# Altium PCB BMS_SLAVE.PcbDoc
Units mm, origin at the board's own origin, x right, y up, seen from the top; angles counter-clockwise.
Board outline 68.05 x 40 mm, 4 copper layers (Top Layer, Layer 1, Layer 2, Bottom Layer), stack 0.603 mm thick; 65 components, 38 nets, 174 pads, 128 vias.
Unrouted connection lines stored in the file: 2.
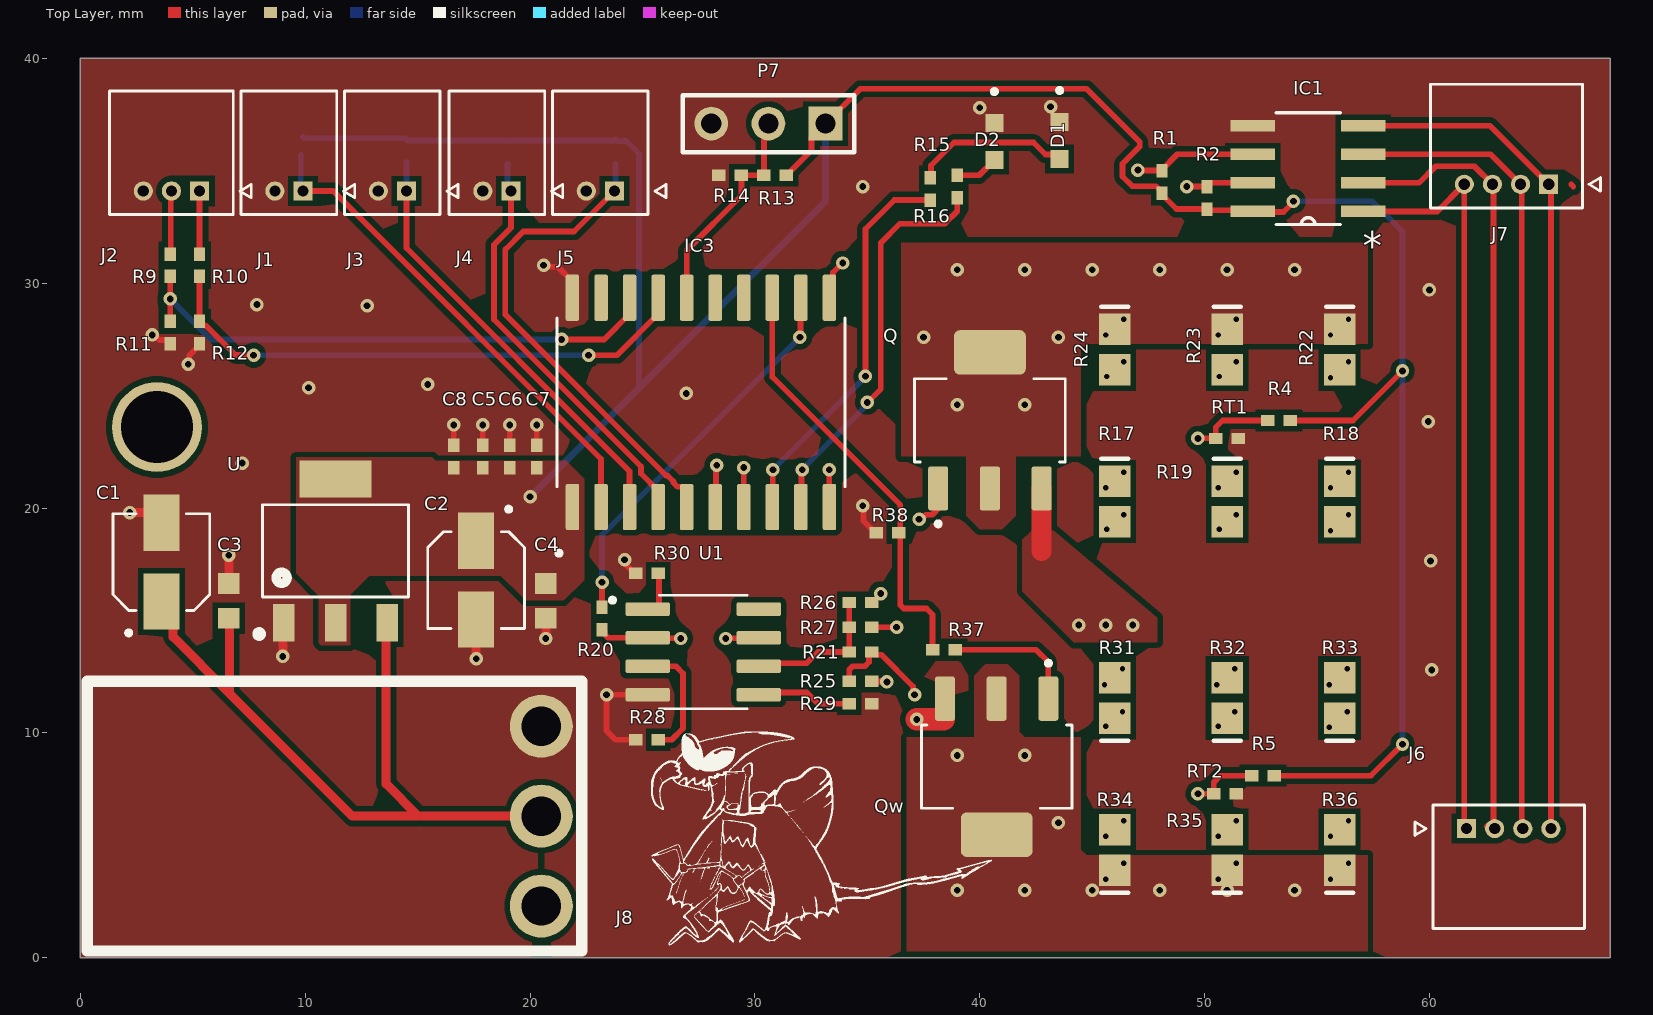
[diagram p0: Top Layer view]
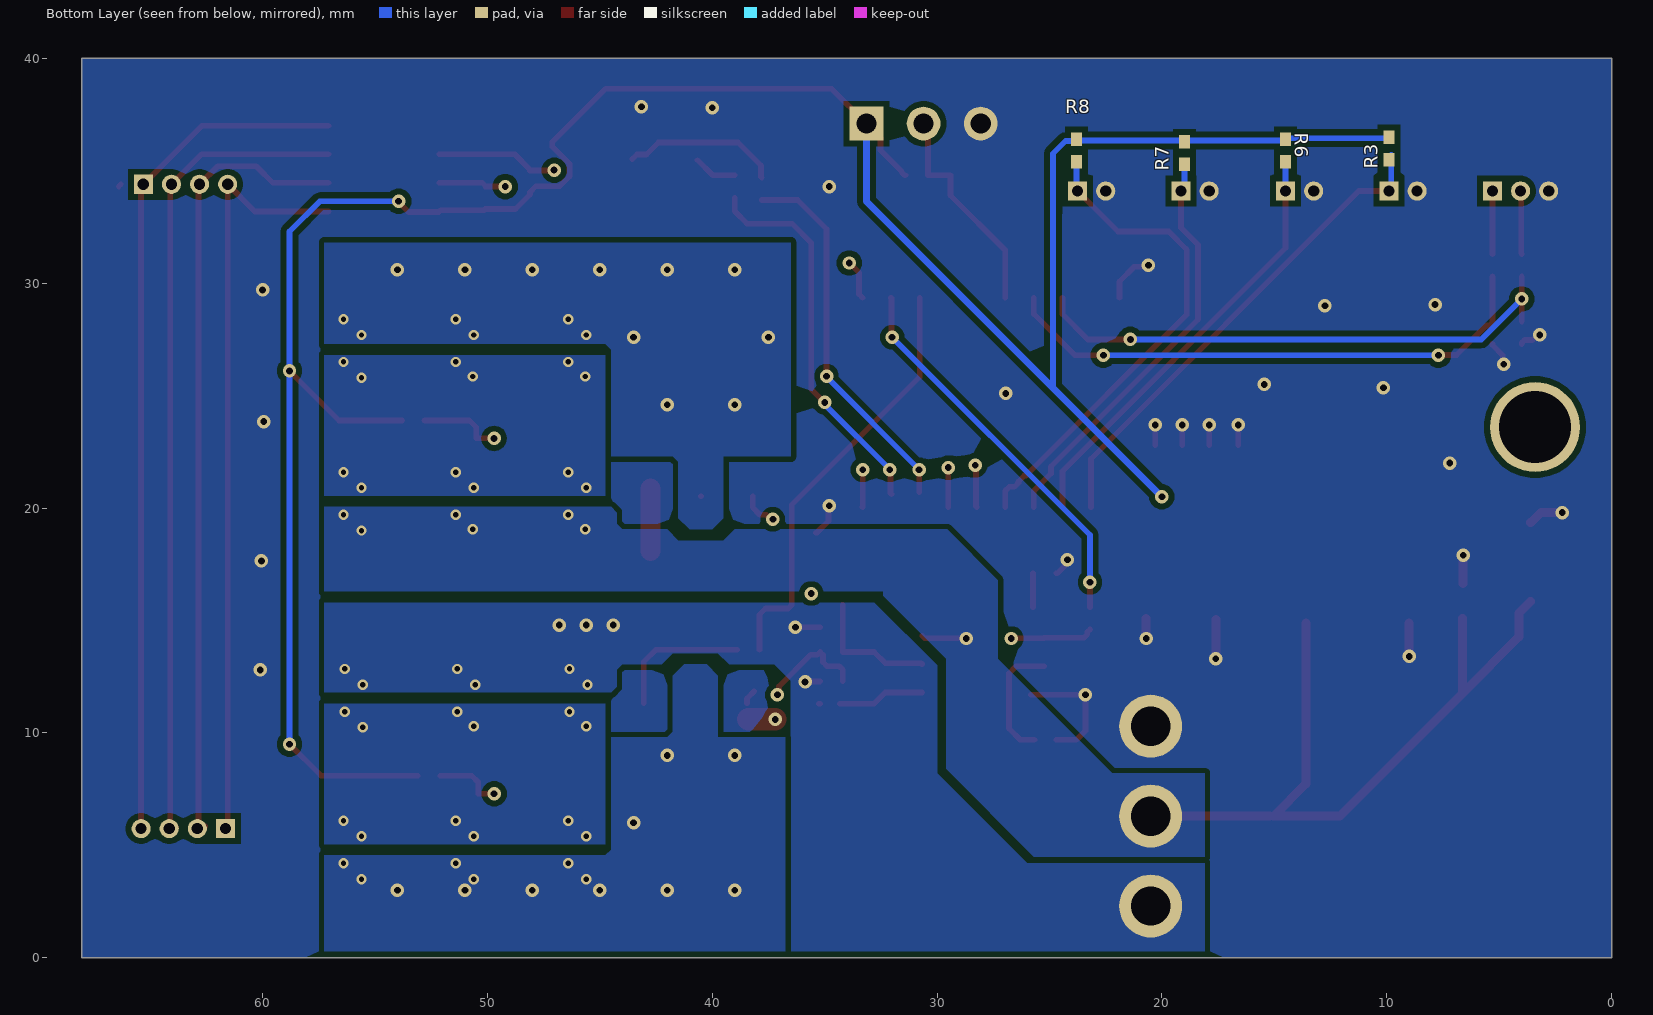
[diagram p1: Bottom Layer view, seen from below]
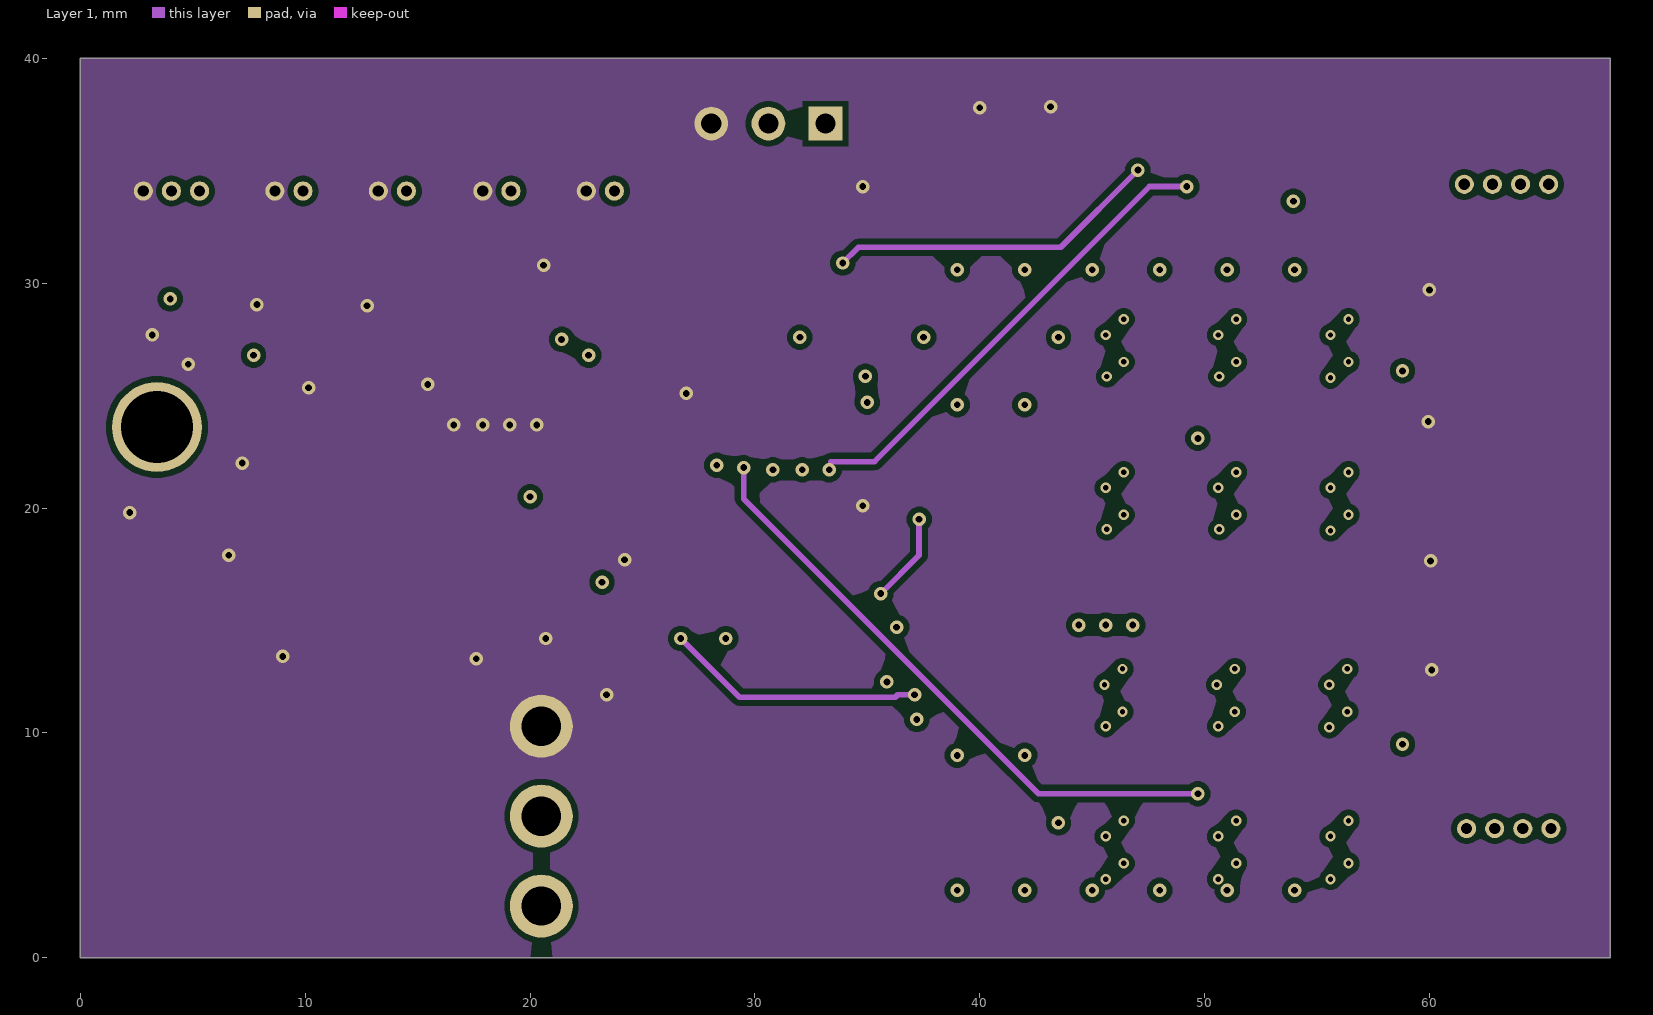
[diagram p2: Layer 1]
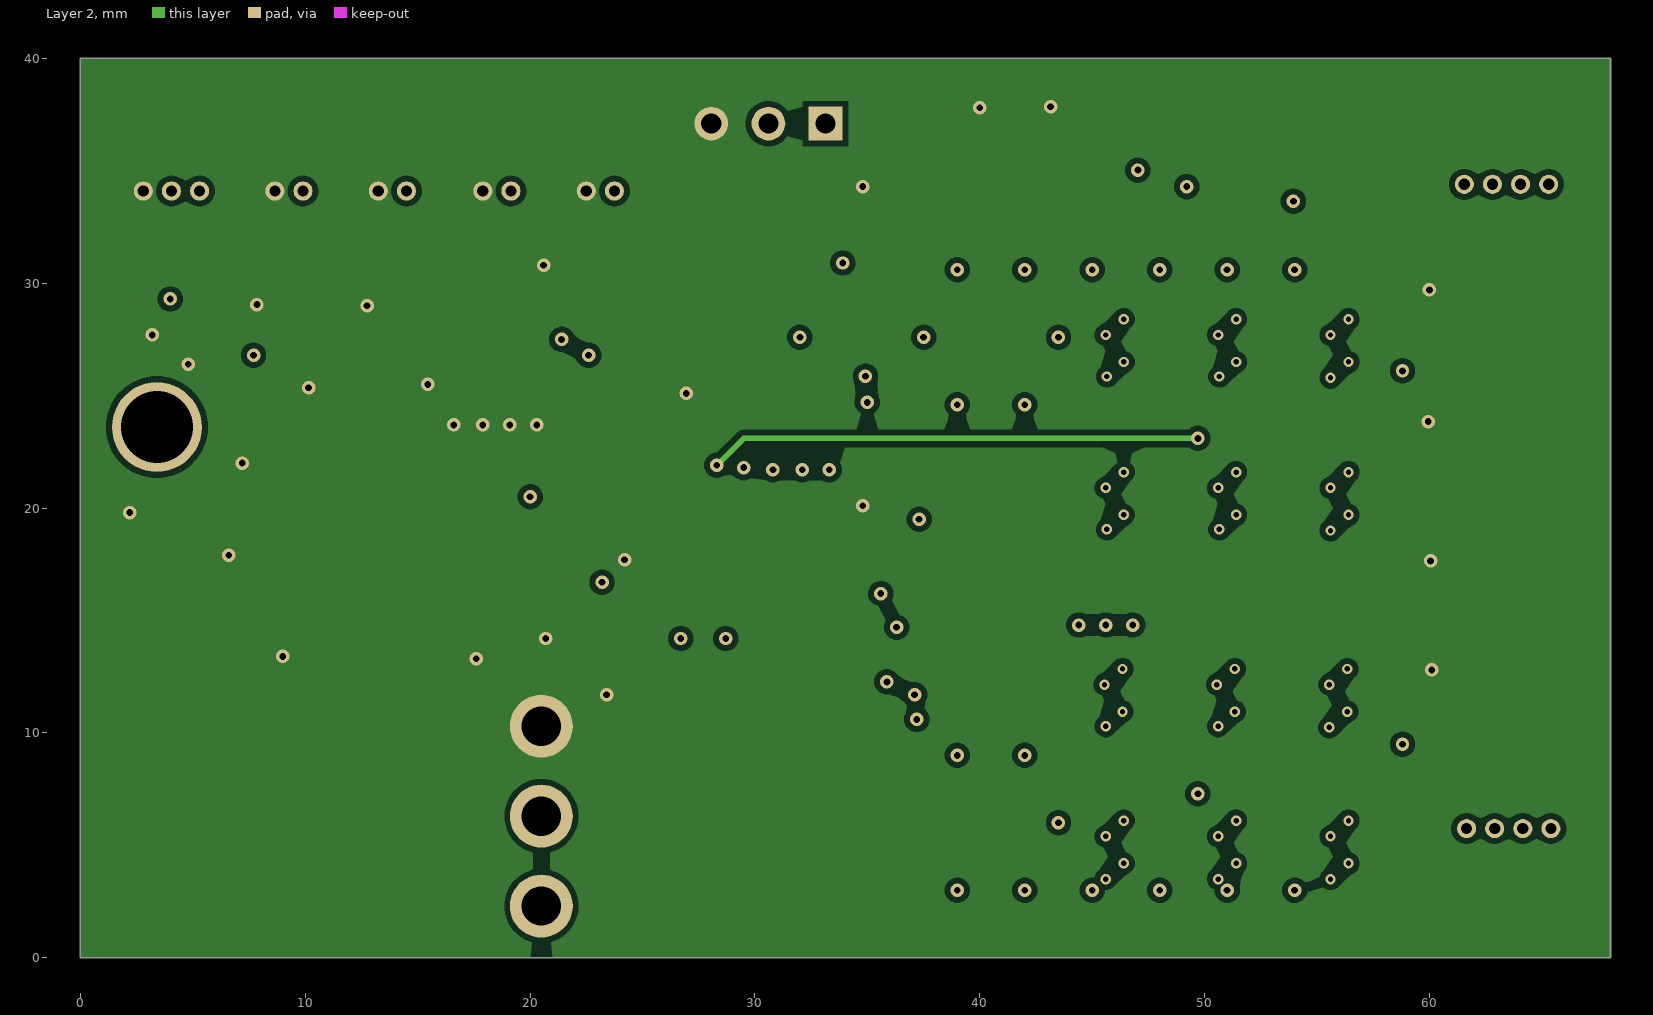
[diagram p3: Layer 2]

## Layer stack, top to bottom
Top Solder: solder mask 0.0102, Solder Resist, Dk 3.5
Top Layer: signal copper 0.0356
Dielectric 2: prepreg 0.0711, PP-006, Dk 4.1
Layer 1: signal copper 0.035
Dielectric 1: dielectric 0.32, FR-4, Dk 4.8
Layer 2: signal copper 0.035
Dielectric 3: prepreg 0.0711, PP-006, Dk 4.1
Bottom Layer: signal copper 0.0356
Bottom Solder: solder mask 0.0102, Solder Resist, Dk 3.5

## Board outline
0,0 0,40 68.05,40 68.05,0

## Design rules (kind name [scope] priority, off if disabled: settings)
Clearance [All] p1: gap=0.254 ignorepadtopadclearanceinfootprint=FALSE except(0: Arc-Hole Track-Hole SMDPad-Hole THPad-Hole Via-Hole Fill-Hole Poly-Hole Region-Hole Text-Hole)
PlaneConnect [All] p1: planeconnectstyle=Direct reliefexpansion=0.508 reliefentries=4 reliefconductorwidth=0.254 reliefairgap=0.254
PolygonConnect [All] p1: connectstyle=Direct reliefconductorwidth=0.254 reliefentries=4 polygonreliefangle="90 Angle" airgapwidth=0.254
RoutingVias [All] p1: holewidth=0.711 width=1.27 viastyle="Through Hole" minholewidth=0.711 minwidth=1.27 maxholewidth=0.711 maxwidth=1.27
SolderMaskExpansion [All] p1: expansion=0.102 istentingtop=FALSE
Width [All] p1: maxlimit=0.254 minlimit=0.254 preferedwidth=0.254
29 further rules are at their usual default settings.

## Classes and differential pairs
component class TEMP_SENSORS: J1 J3 J4 J5 R3 R4 R5 R6 R7 R8 RT1 RT2
component class PSU: C1 C2 C3 C4 J8 U
component class MCU: C5 C6 C7 C8 D1 D2 IC3 P7 R13 R14 R15 R16
component class I2C: IC1 J6 J7 R1 R2
component class BAT_VOLTAGE_SENS: J2 R9 R10 R11 R12
component class BALANCER: Q Qw R17 R18 R19 R20 R21 R22 R23 R24 R25 R26 R27 R28 R29 R30 R31 R32 R33 R34 R35 R36 R37 R38 U1

## Components (designator, comment, footprint, x,y, rotation, side; value= is the part's Value field where it differs from the comment)
C1 "4,7uF" CAP_EEE1CA100SR 3.6,17.6 r90 top
C2 "10uF" CAP_EEE1CA100SR 17.6,16.8 r270 top
C3 "100nF" CAPC1608X90N 6.6,15.875 r90 top
C4 "100nF" CAPC1608X90N 20.7,15.875 r270 top
C5 "Cap" 0402 17.9,22.3 r270 top value=100nF
C6 "Cap" 0402 19.1,22.3 r270 top value=100nF
C7 "Cap" 0402 20.3,22.3 r270 top value=100nF
C8 "Cap" 0402 16.6,22.3 r270 top value=100nF
D1 "KPT-1608ZGC" LED_KPT-1608ZGC 43.55,36.35 r270 top
D2 "KPT-1608ZGC" LED_KPT-1608ZGC 40.65,36.3 r270 top
IC1 "ADUM1251" SOIC127P600X175-8N 54.6,35.1 r180 top
IC3 "Component_1" SOIC127P1032X265-20N 27.6,24.7 r90 top
J1 "530480210" MOLEX_530480210 9.9,34.1 r180 top
J2 "530480310" MOLEX_530480310 5.3,34.1 r180 top
J3 "530480210" MOLEX_530480210 14.5,34.1 r180 top
J4 "530480210" MOLEX_530480210 19.15,34.1 r180 top
J5 "530480210" MOLEX_530480210 23.75,34.1 r180 top
J6 "530480410" MOLEX_530480410 61.65,5.745 r0 top
J7 "530480410" MOLEX_530480410 65.3,34.4 r180 top
J8 "1718140003 MOLEX" 3pinangled 10.3,6.3 r90 top
P7 "UPDI" HDR1X3 33.14,37.1 r180 top
Q "BUK98150-55A/CUF" SOT230P700X180-4N 40.45,23.9 r90 top
Qw "BUK98150-55A/CUF" SOT230P700X180-4N 40.75,8.5 r270 top
R1 "Res1" 0402 48.1,34.5 r270 top value=1K
R2 "Res1" 0402 50.1,33.8 r270 top value=1K
R3 "Res1" 0402 9.9,36 r90 bottom value=1K
R4 "Res1" 0402 53.3,23.9 r0 top value=1K
R5 "Res1" 0402 52.6,8.1 r0 top value=1K
R6 "Res1" 0402 14.5,35.9 r90 bottom value=1K
R7 "Res1" 0402 19,35.8 r90 bottom value=1K
R8 "Res1" 0402 23.8,35.9 r90 bottom value=1K
R9 "Res1" 0402 4,30.8 r90 top value=1K8
R10 "Res1" 0402 5.3,30.8 r90 top value=1K8
R11 "Res1" 0402 4,27.8 r90 top value=1K
R12 "Res1" 0402 5.3,27.8 r90 top value=1K
R13 "NOT FITTED" 0402 30.9,34.8 r180 top value=1K
R14 "NOT FITTED" 0402 28.9,34.8 r180 top value=1K
R15 "NOT FITTED" 0402 37.8,34.2 r90 top value=1K5
R16 "NOT FITTED" 0402 39,34.3 r90 top value=1K5
R17 "Res1" C2512 46,20.3 r270 top value=2R7
R18 "Res1" C2512 56,20.3 r270 top value=2R7
R19 "Res1" C2512 51,20.3 r270 top value=2R7
R20 "Res1" 0402 23.2,15.1 r270 top value=10K
R21 "Res1" 0402 34.7,13.6 r180 top value=10K
R22 "Res1" C2512 56,27.05 r270 top value=2R7
R23 "Res1" C2512 51,27.05 r270 top value=2R7
R24 "Res1" C2512 46,27.05 r270 top value=2R7
R25 "Res1" 0402 34.7,12.3 r180 top value=10K
R26 "Res1" 0402 34.7,15.8 r0 top value=1K
R27 "Res1" 0402 34.7,14.7 r180 top value=1K
R28 "Res1" 0402 25.2,9.7 r0 top value=1K
R29 "Res1" 0402 34.7,11.3 r180 top value=1K
R30 "Res1" 0402 25.2,17.1 r0 top value=1K
R31 "Res1" C2512 46,11.55 r90 top value=2R7
R32 "Res1" C2512 51,11.55 r90 top value=2R7
R33 "Res1" C2512 56,11.55 r90 top value=2R7
R34 "Res1" C2512 46,4.8 r90 top value=2R7
R35 "Res1" C2512 51,4.8 r90 top value=2R7
R36 "Res1" C2512 56,4.8 r90 top value=2R7
R37 "Res1" 0402 38.4,13.7 r0 top value=1K
R38 "Res1" 0402 35.9,18.9 r0 top value=1K
RT1 "Res Thermal" 0402 51,23.1 r180 top
RT2 "Res Thermal" 0402 50.9,7.3 r180 top
U "SPX1117M3-L-3-3/TR" SOT230P700X180-3N 11.35,18.1 r90 top
U1 "TL081CD" SOIC127P599X175-8N 27.7,13.6 r0 top

## Footprints (in the part's own frame and the unit in brackets; to place one, negate y for a bottom-side part, rotate by r counter-clockwise, add the part's x,y. Pads: shape width x height; smd on the part's side, far side on the other; paste and mask are expansions set on the pad)
3pinangled [mm] "3pin connector, max 7A"
  round 2.8 hole 1.75: 1(-4,-10.2) 2(0,-10.2) 3(4,-10.2)
  silkscreen extent -6,-12 6,10, body extent -5.87,-10.87 5.87,9.73, height 10.02
0402 [mm] "Chip Capacitor, Body 1.0x0.5mm, IPC High Density"
  rect 0.6x0.5 smd: 1(-0.5,0) 2(0.5,0)
  body extent -0.55,-0.3 0.55,0.3, height 1.3
C2512 [mm] "Chip Capacitor, Body 2.54x1.27mm, IPC High Density"
  rect 1.4x1.4 smd: 1(-0.9,0) 2(0.9,0)
  silkscreen extent -1.9,-0.6 -1.9,0.6, body extent -1.45,-0.82 1.45,0.82, height 1.3
CAP_EEE1CA100SR [mm]
  rect 2.5x1.6 smd: 1(-1.75,0) 2(1.75,0)
  silkscreen extent -3.25,-2.15 2.15,2.15, body extent -2.5,-2.15 2.5,2.15, height 5.4
CAPC1608X90N [mm]
  rect 0.92x0.97 smd: 1(-0.775,0) 2(0.775,0)
  body extent -0.8,-0.4 0.8,0.4, height 0.95
HDR1X3 [mm] "Connector; Header; 3 Position"
  rect 1.5x1.5 hole 0.9: 1(0,0)
  round 1.5 hole 0.9: 2(2.54,0) 3(5.08,0)
  silkscreen extent -1.27,-1.27 6.35,1.27
LED_KPT-1608ZGC [mm]
  rect 0.8x0.8 smd: 1(0.825,0) 2(-0.825,0)
  silkscreen extent -2.32,-0.1 -2.13,0.1, body extent -0.8,-0.4 0.8,0.4, height 1.1
MOLEX_530480210 [mm]
  rect 0.85x0.85 / inner round 0.85 / far side rect 0.85x0.85 hole 0.5 mask+0.076: 1(0,0)
  round 0.85 hole 0.5 mask+0.076: 2(1.25,0)
  silkscreen extent -2.3,-4.45 2.75,1.05, body extent -1.49,-4.48 2.76,1.02, height 3.52
MOLEX_530480310 [mm]
  rect 0.85x0.85 / inner round 0.85 / far side rect 0.85x0.85 hole 0.5 mask+0.076: 1(0,0)
  round 0.85 hole 0.5 mask+0.076: 2(1.25,0) 3(2.5,0)
  silkscreen extent -2.3,-4.45 4,1.05, body extent -1.48,-4.4 4.02,1.1, height 3.5
MOLEX_530480410 [mm]
  rect 0.85x0.85 / inner round 0.85 / far side rect 0.85x0.85 hole 0.5 mask+0.076: 1(0,0)
  round 0.85 hole 0.5 mask+0.076: 2(1.25,0) 3(2.5,0) 4(3.75,0)
  silkscreen extent -2.3,-4.45 5.25,1.05, body extent -1.52,-4.46 5.23,1.04, height 3.52
SOIC127P599X175-8N [mm]
  rrect25% 1.97x0.6 smd: 1(-2.47,1.905) 2(-2.47,0.635) 3(-2.47,-0.635) 4(-2.47,-1.905) 5(2.47,-1.905) 6(2.47,-0.635) 7(2.47,0.635) 8(2.47,1.905)
  silkscreen extent -4.14,-2.52 1.95,2.52, body extent -3,-2.45 3,2.45, height 1.75
SOIC127P600X175-8N [mil]
  rect 78x20 smd: 1(-97,75) 2(-97,25) 3(-97,-25) 4(-97,-75) 5(97,-75) 6(97,-25) 7(97,25) 8(97,75)
  silkscreen extent -56,-98 56,98, body extent -118,-96 118,96, height 69
SOIC127P1032X265-20N [mm]
  rrect25% 2.05x0.6 smd: 1(-4.655,5.715) 2(-4.655,4.445) 3(-4.655,3.175) 4(-4.655,1.905) 5(-4.655,0.635) 6(-4.655,-0.635) 7(-4.655,-1.905) 8(-4.655,-3.175) 9(-4.655,-4.445) 10(-4.655,-5.715) 11(4.655,-5.715) 12(4.655,-4.445) 13(4.655,-3.175) 14(4.655,-1.905) 15(4.655,-0.635) 16(4.655,0.635) 17(4.655,1.905) 18(4.655,3.175) 19(4.655,4.445) 20(4.655,5.715)
  silkscreen extent -6.8,-6.4 3.75,6.41, body extent -5.07,-6.3 5.07,6.3, height 2.24
SOT230P700X180-3N [mm]
  rect 1.65x0.95 smd: 1(-3.2,2.3) 2(-3.2,0) 3(-3.2,-2.3)
  rect 1.65x3.2 smd: 4(3.2,0)
  silkscreen extent -3.8,-3.25 2.05,3.5, body extent -3.52,-3.25 3.52,3.25, height 1.8
SOT230P700X180-4N [mm]
  rrect25% 1.97x0.89 smd: 1(-3.025,2.3) 2(-3.025,0) 3(-3.025,-2.3)
  rrect25% 1.97x3.19 smd: 4(3.025,0)
  silkscreen extent -4.7,-3.35 1.85,3.35, body extent -3.52,-3.25 3.52,3.25, height 1.8

## Part data
C1 C2: library part EEE1CA100SR, "10ÂµF 16V Aluminum Electrolytic Capacitors Radial, Can - SMD 2000 Hrs @ 85Â°C", Package="RADIAL-2 Panasonic", Check_prices=https://www.snapeda.com/parts/EEE1CA100SR/Panasonic/view-part/?ref=eda, Digi-Key_Part_Number=PCE3878CT-ND, MF=Panasonic, MP=EEE1CA100SR, SnapEDA_Link=https://www.snapeda.com/parts/EEE1CA100SR/Panasonic/view-part/?ref=snap
C3 C4: library part C0603C104J4RAC, "0.1ÂµF Â±5% 16V Ceramic Capacitor X7R 0603 (1608 Metric)", Package="0603 KEMET", Availability=Warning, Check_prices=https://www.snapeda.com/parts/C0603C104J4RAC/KEMET/view-part/1763758/?ref=eda, MF=KEMET, MP=C0603C104J4RAC, Price=None, SnapEDA_Link=https://www.snapeda.com/parts/C0603C104J4RAC/KEMET/view-part/1763758/?ref=snap
C5 C6 C7 C8: "Capacitor", LatestRevisionDate=17-Jul-2002, LatestRevisionNote="Re-released for DXP Platform.", PackageDescription="Radial Cap, Thru-Hole; 2 Leads; 0.3 in Pin Spacing", PackageReference=RAD-0.3, Published=8-Jun-2000, Publisher="Altium Limited"
D1 D2: "1.6x0.8mm Smd Chip Led Lamp", Package="0603 Kingbright", Availability="In Stock", Check_prices=https://www.snapeda.com/parts/KPT-1608ZGC/Kingbright/view-part/?ref=eda, MF=Kingbright, MP=KPT-1608ZGC, Price=None, SnapEDA_Link=https://www.snapeda.com/parts/KPT-1608ZGC/Kingbright/view-part/?ref=snap
IC1: "IÂ²C Digital Isolator 2500Vrms 2 Channel 1Mbps 25kV/Âµs CMTI 8-SOIC (0.154, 3.90mm Width)", Package="SOIC-8 Analog Devices", Availability=Unavailable, MF="Analog Devices", MP=ADUM1251, Price=None, SnapEDA_Link=https://www.snapeda.com/parts/ADUM1251/Analog%20Devices%20Inc./view-part/3223540/?ref=snap
J1 J3 J4 J5: "Conn Shrouded Header (4 Sides) HDR 2 POS 1.25mm Solder RA Side Entry Thru-Hole PicoBladeâ„¢ Tray", Package=None, Availability="In Stock", Check_prices=https://www.snapeda.com/parts/530480210/Molex/view-part/?ref=eda, MF=Molex, MP=530480210, Price=None, Purchase-URL=https://pricing.snapeda.com/search/part/530480210/?ref=eda, SnapEDA_Link=https://www.snapeda.com/parts/530480210/Molex/view-part/?ref=snap
J2 J6 J7: Package=None, Availability=Unavailable, Price=None
  J2: MP=530480310
  J6 J7: MP=530480410
J8: library part 3pinangled
P7: library part "Header 3", "Header, 3-Pin", LatestRevisionDate=17-Jul-2002, LatestRevisionNote="Re-released for DXP Platform.", Publisher="Altium Limited"
Q Qw: "N-Channel 55V 5.5A _Tc_ 8W _Tc_ Surface Mount SOT-223", Package="TO-261-4 Nexperia USA", Availability=Unavailable, DigiKey-Purchase-URL=https://snapeda.com/shop?store=DigiKey&id=2783744, MF="Nexperia USA", MP=BUK98150-55A/CUF, Price=None, SnapEDA_Link=https://www.snapeda.com/parts/BUK98150-55A/CUF/Nexperia%20USA%20Inc./view-part/2783744/?ref=snap
R1 R2 R3 R4 R5 R6 R7 R8 R9 R10 R11 R12 R17 R18 R19 R20 R21 R22 R23 R24 R25 R26 R27 R28 R29 R30 R31 R32 R33 R34 R35 R36 R37 R38: "Resistor", LatestRevisionDate=17-Jul-2002, LatestRevisionNote="Re-released for DXP Platform.", PackageDescription="Axial Device, Thru-Hole; 2 Leads; 0.3 in Pin Spacing", PackageReference=AXIAL-0.3, Published=8-Jun-2000, Publisher="Altium Limited"
R13 R14 R15 R16: library part Res1, "Resistor", LatestRevisionDate=17-Jul-2002, LatestRevisionNote="Re-released for DXP Platform.", PackageDescription="Axial Device, Thru-Hole; 2 Leads; 0.3 in Pin Spacing", PackageReference=AXIAL-0.3, Published=8-Jun-2000, Publisher="Altium Limited"
RT1 RT2: "Thermistor", Code_IPC=RESC2012, LatestRevisionDate=29-May-2009, LatestRevisionNote="IPC-7351 Footprint Added.", PackageDescription="Chip Resistor 0805 Case Size", PackageReference=6-0805, PackageVersion=Mar-2003, Published=24-Mar-1999, Publisher="Altium Limited"
U: "Linear Voltage Regulator IC Positive Fixed 1 Output 800mA SOT-223", Package="SOT-223 Exar", Availability=Unavailable, MF="MaxLinear, Inc.", MP=SPX1117M3-L-3-3/TR, Price=None, SnapEDA_Link=https://www.snapeda.com/parts/SPX1117M3-L-3-3/TR/MaxLinear%2C%20Inc./view-part/376705/?ref=snap
U1: "High Slew Rate JFET-Input Operational Amplifier 8-SOIC 0 to 70", Package="SOIC-8 Texas Instruments", Availability=Good, MF="Texas Instruments", MP=TL081CD, Price=None, Purchase-URL=https://pricing.snapeda.com/search/part/TL081CD/?ref=eda, SnapEDA_Link=https://www.snapeda.com/parts/TL081CD/Texas%20Instruments/view-part/4793911/?ref=snap

## Free pads (board coordinates)
  round 4 hole 3.2: 2(3.4,23.6)

## Via types
v1: diameter 0.6, hole 0.3, Top Layer to Bottom Layer, 80 vias
v2: diameter 0.46, hole 0.24, Top Layer to Bottom Layer, 48 vias

## Nets (pads, with @x,y where several pads share a name; then routed paths per layer and width w, separated by ;. In a path a pad name is that pad's centre, name@x,y a point inside that pad or via, vN(x,y) a via of type N, cw(c..) or ccw(c..) an arc to the next point about the centre after c; other vN are vias at no path point)
3V3: C2.1 C4.1 C5.2 C6.2 C7.2 C8.2 IC1.8 IC3.1 P7.1 R1.2 R2.2 R3.2 R4.2 R5.2 R6.2 R7.2 R8.2 R13.1 U.2 U.4 | length 117.2
  Top Layer w0.254: R13.1 31.45,34.8 31.573,34.923 31.573,34.973 32.517,35.917 32.517,36.477 P7.1 34.69,38.65 44.75,38.65 47.113,36.287 47.113,36.076 46.351,35.314 46.351,34.749 46.781,34.319 47.831,34.319 48.1,34.05 48.1,33.95 48.75,33.3 R2.2 50.153,33.247 52.084,33.247 52.159,33.172 53.508,33.172 53.95,33.615 v1(53.95,33.65) ; R5.2 57.4,8.1 v1(58.8,9.5) ; R4.2 56.6,23.9 v1(58.8,26.1)
  Bottom Layer w0.254: R3.2 9.95,36.45 14.45,36.45 R6.2 14.55,36.35 18.95,36.35 R7.2 19.05,36.35 23.75,36.35 R8.2 23.876,36.324 24.282,36.324 24.842,35.764 24.842,25.342 ; v1(53.95,33.65) 57.45,33.65 58.8,32.3 v1(58.8,26.1) v1(58.8,9.5)
  Bottom Layer w0.3: v1(20,20.5) 24.842,25.342 33.14,33.64 P7.1
balancer2-: Q.2 Q.4 R22.1 R23.1 R24.1 | length 0
  other v1: 39,24.6 42,24.6 37.5,27.6 43.5,27.6 39,30.6 42,30.6 45,30.6 48,30.6 51,30.6 54,30.6
  other v2: 45.6,27.7 50.6,27.7 55.6,27.7 46.4,28.4 51.4,28.4 56.4,28.4
GND: C1.2 C2.2 C3.2 C4.2 C5.1 C6.1 C7.1 C8.1 D1.2 D2.2 IC1.5 IC3.20 J1.2 J2.3 J3.2 J4.2 J5.2 J8.3 P7.3 Qw.3 R11.1 R12.1 R14.2 R28.1 R29.1 R30.1 R38.1 RT1.1 RT2.1 U1.4 U.1 | length 24.7
  Top Layer w0.254: v1(3.2,27.7) 3.294,27.7 3.521,27.473 3.877,27.473 4,27.35 R11.1 ; v1(4.8,26.4) 4.843,26.443 4.843,26.793 5.3,27.25 R12.1 ; C8.1 v1(16.6,23.7) ; C5.1 v1(17.9,23.7) ; C6.1 v1(19.1,23.7) ; C7.1 v1(20.3,23.7) ; v1(20.6,30.8) 20.666,30.734 21.231,30.734 21.885,30.08 IC3.20 ; v1(24.2,17.7) 24.266,17.634 24.266,17.484 24.65,17.1 R30.1 ; R28.1 23.8,9.7 23.4,10.1 v1(23.4,11.7) 23.402,11.698 U1.4@25.828,11.698 ; v1(34.8,20.1) 34.831,20.069 34.831,19.419 35.35,18.9 R38.1 ; R29.1 R29.1@35.25,11.3 ; Qw.3@38.132,11.854 38.45,11.536 Qw.3@38.45,11.325
  Top Layer w0.4: v1(2.2,19.8) 3.15,19.8 C1.2 ; C3.2 v1(6.6,17.9) ; v1(9,13.403) U.1@9,14.9 ; v1(17.6,13.3) C2.2 ; v1(20.7,14.2) C4.2
  Top Layer w1: v1(37.2,10.6) Qw.3@38.4,10.6
  other v1: 60.1,12.8 60.05,17.65 7.2,22 59.95,23.85 26.95,25.1 10.15,25.35 15.45,25.5 12.75,29 7.85,29.05 60,29.7 34.8,34.3 40,37.8 43.15,37.85
GND2: IC1.4 J6.4 J7.1 | length 38.1
  Top Layer w0.254: IC1.4 62.695,37.005 J7.1 ; J6.4@65.1,5.795 J6.4@65.15,5.745 ; J6.4 J7.1@65.4,34.3 ; 66.3,34.4 66.4,34.3
I2C_SCL: IC1.6 IC3.11 R1.1 | length 22.1
  Top Layer w0.254: IC3.11 33.476,29.516 33.476,30.476 v1(33.9,30.9) ; v1(47.032,35.032) 47.047,35.016 48.084,35.016 R1.1 48.1,35.05 48.785,35.735 IC1.6
  Layer 1 w0.254: v1(33.9,30.9) 34.6,31.6 43.6,31.6 v1(47.032,35.032)
I2C_SDA: IC1.7 IC3.10 R2.1 | length 25.6
  Top Layer w0.254: v1(33.3,21.7) 33.308,21.692 33.308,20.052 IC3.10 ; v1(49.2,34.3) R2.1 50.1,34.342 50.223,34.465 IC1.7
  Layer 1 w0.254: 33.366,22.066 35.316,22.066 47.55,34.3 v1(49.2,34.3)
ISO_SCL: IC1.3 J6.3 J7.2 | length 36.2
  Top Layer w0.254: IC1.3 62.715,35.735 J7.2 ; J6.3@63.85,5.795 J6.3@63.9,5.745 ; J6.3@64.1,5.795 J7.2@64.1,34.35
ISO_SDA: IC1.2 J6.2 J7.3 | length 35.1
  Top Layer w0.254: IC1.2 59.535,34.465 60.276,35.206 61.994,35.206 J7.3 ; J6.2@62.55,5.845 J6.2@62.65,5.745 ; J6.2@62.85,5.795 J7.3@62.85,34.35
LED_CHARGE: IC3.9 R16.1 | length 17.2
  Top Layer w0.254: IC3.9@32.023,20.613 32.073,20.663 32.073,21.673 v1(32.1,21.7) ; v1(35,24.7) 35.6,25.3 35.6,31.8 36.45,32.65 38.45,32.65 39,33.2 R16.1
  Bottom Layer w0.254: v1(32.1,21.7) 32.1,21.72 35,24.62 v1(35,24.7)
LED_PING: IC3.8 R15.1 | length 16.8
  Top Layer w0.254: IC3.8@30.788,20.698 30.788,21.688 v1(30.8,21.7) ; v1(34.916,25.861) 34.916,32.416 36.2,33.7 R15.1
  Bottom Layer w0.254: v1(30.8,21.7) 30.8,21.722 34.916,25.839 v1(34.916,25.861)
NetD1_1: D1.1 R15.2 | length 7
  Top Layer w0.254: R15.2 37.832,34.732 37.832,35.232 38.856,36.256 42.394,36.256 42.922,35.728 43.347,35.728 D1.1
NetD2_1: D2.1 R16.2 | length 1.9
  Top Layer w0.254: R16.2 39.975,34.8 D2.1
NetIC3_6: IC3.6 R4.1 RT1.2 | length 27.5
  Top Layer w0.254: IC3.6 28.267,20.077 28.267,21.868 v1(28.3,21.9) ; v1(49.7,23.1) RT1.2 50.5,23.6 50.8,23.9 R4.1
  Layer 2 w0.254: v1(28.3,21.9) 29.5,23.1 v1(49.7,23.1)
NetIC3_7: IC3.7 R5.1 RT2.2 | length 31.8
  Top Layer w0.254: v1(29.5,21.8) 29.503,21.797 29.503,20.047 IC3.7 ; v1(49.7,7.3) RT2.2 ; RT2.2@50.408,7.3 50.408,7.808 50.7,8.1 R5.1
  Layer 1 w0.254: v1(29.5,21.8) 29.5,20.4 42.6,7.3 v1(49.7,7.3)
NetJ2_1: J2.1 R10.2 | length 3.1
  Top Layer w0.254: J2.1@5.295,34.355 5.3,34.35 R10.2
NetJ2_2: J2.2 R9.2 | length 3.1
  Top Layer w0.254: R9.2 4.023,31.323 4.023,34.332 J2.2@4.045,34.355
NetQ_1: Q.1 R26.2 | length 5.6
  Top Layer w0.254: v1(37.3,19.5) 37.394,19.5 37.601,19.708 37.882,19.708 38.2,20.026 Q.1@38.2,20.525
  Layer 1 w0.254: v1(35.6,16.2) 37.3,17.9 v1(37.3,19.5)
NetQw_1: Qw.1 R37.2 | length 6.2
  Top Layer w0.254: R37.2 42.5,13.7 43.05,13.15 Qw.1@43.05,11.325
NetQw_2: Qw.2 Qw.4 R34.1 R35.1 R36.1
  other v1: 39,3 42,3 45,3 48,3 51,3 54,3 43.5,6 39,9 42,9
  other v2: 45.6,3.5 50.6,3.5 55.6,3.5 46.4,4.2 51.4,4.2 56.4,4.2
NetR17_1: R17.1 R18.1 R19.1 R22.2 R23.2 R24.2
  other v2: 45.6,20.9 50.6,20.9 55.6,20.9 46.4,21.6 51.4,21.6 56.4,21.6 55.6,25.8 45.654,25.854 50.654,25.854 46.4,26.5 51.4,26.5 56.4,26.5
NetR20_2: R20.2 R21.1 R25.2 U1.2 | length 20
  Top Layer w0.254: R20.2 23.323,14.477 23.323,14.384 23.472,14.235 U1.2 25.247,14.218 26.682,14.218 v1(26.7,14.2) ; R25.2 34.2,12.82 34.349,12.969 34.891,12.969 35.07,13.149 R21.1@35.07,13.477 ; R21.1 35.323,13.477 35.623,13.477 37.034,12.066 37.034,11.766 v1(37.1,11.7)
  Layer 1 w0.254: v1(26.7,14.2) 29.313,11.587 36.24,11.587 36.353,11.7 v1(37.1,11.7)
NetR28_2: R28.2 U1.3 | length 5.5
  Top Layer w0.254: U1.3 26.484,12.965 26.8,12.649 26.8,10.2 26.3,9.7 R28.2@25.668,9.7
NetR29_2: R29.2 U1.5 | length 3.9
  Top Layer w0.254: U1.5@30.67,11.795 32.305,11.795 32.8,11.3 R29.2@34.32,11.3
NetR30_2: R30.2 U1.1 | length 1.5
  Top Layer w0.254: U1.1@25.73,15.605 R30.2@25.73,17.1
NetR31_1: R31.1 R32.1 R33.1 R34.2 R35.2 R36.2
  other v2: 45.6,5.4 50.6,5.4 55.6,5.4 46.4,6.1 51.4,6.1 56.4,6.1 55.546,10.246 45.6,10.3 50.6,10.3 46.346,10.946 51.346,10.946 56.346,10.946
NRST: IC3.16 P7.2 R13.2 R14.1 | length 9.8
  Top Layer w0.254: IC3.16 26.965,31.465 29.4,33.9 R14.1 R13.2 30.4,36.9 P7.2
PWM_B1: IC3.13 R37.1 R38.2 | length 19.2
  Top Layer w0.254: IC3.13 30.775,25.825 36.469,20.131 36.469,15.68 36.618,15.531 37.631,15.531 37.9,15.262 R37.1
PWM_B2: IC3.12 R20.1 | length 17.4
  Top Layer w0.254: R20.1 v1(23.2,16.7) ; v1(32,27.6) 32.023,27.623 32.023,29.332 IC3.12
  Bottom Layer w0.254: v1(23.2,16.7) 23.2,18.8 v1(32,27.6)
Signal2: R21.2 R26.1 R27.2 U1.6 | length 5.8
  Top Layer w0.254: U1.6@30.67,13.065 30.705,13.1 32.3,13.1 32.8,13.6 R21.2 R27.2@34.2,14.6 ; R27.2 R26.1@34.2,15.7
T1: IC3.2 J1.1 R3.1 | length 22
  Top Layer w0.254: J1.1 11.245,34.1 23.155,22.19 IC3.2
  Bottom Layer w0.254: R3.1@9.8,35.7 9.8,34.2 J1.1
T2: IC3.3 J3.1 R6.1 | length 19.5
  Top Layer w0.254: J3.1 14.5,31.563 24.425,21.638 IC3.3
  Bottom Layer w0.254: J3.1 R6.1
T3: IC3.4 J4.1 R7.1 | length 18.7
  Top Layer w0.254: J4.1 19.15,32.468 18.392,31.71 18.392,28.39 24.933,21.849 24.933,21.532 25.695,20.77 IC3.4
  Bottom Layer w0.254: R7.1 19,34.25 J4.1
T4: IC3.5 J5.1 R8.1 | length 22.1
  Top Layer w0.254: J5.1 21.95,32.3 19.7,32.3 18.9,31.5 18.9,28.6 26.049,21.451 26.109,21.451 26.376,21.184 26.376,21.124 26.557,20.943 26.792,20.943 26.965,20.77 IC3.5
  Bottom Layer w0.254: J5.1 23.8,34.15 R8.1@23.8,35.3
V_SENS_1: IC3.18 R9.1 R11.2 | length 24.4
  Top Layer w0.254: R11.2 v1(4,29.3) 4,29.9 R9.1 ; v1(21.4,27.5) 23.295,27.5 24.425,28.63 IC3.18
  Bottom Layer w0.254: v1(4,29.3) 5.8,27.5 v1(21.4,27.5)
V_SENS_2: IC3.17 R10.1 R12.2 | length 24.6
  Top Layer w0.254: R10.1 R12.2@5.3,28.25 ; v1(7.7,26.8) 7.692,26.808 6.892,26.808 5.6,28.1 5.572,28.1 5.545,28.127 5.423,28.127 R12.2@5.3,28.25 ; v1(22.6,26.8) 23.865,26.8 25.695,28.63 IC3.17 ; R12.2@5.3,28.25 R12.2 R12.2@5.3,28.25
  Bottom Layer w0.254: v1(7.7,26.8) v1(22.6,26.8)
VBAT1: J8.1 Q.3 R25.1 R27.1 R31.2 R32.2 R33.2 | length 4.6
  Top Layer w0.254: R25.1 35.216,12.284 35.853,12.284 v1(35.868,12.268) ; R27.1 v1(36.3,14.7)
  Top Layer w0.89: 42.75,18.1 Q.3
  other v1: 44.4,14.8 45.6,14.8 46.8,14.8
  other v2: 45.546,12.146 50.546,12.146 55.546,12.146 46.346,12.846 51.346,12.846 56.346,12.846
VBAT2: C1.1 C3.1 J8.2 R17.2 R18.2 R19.2 U1.7 U.3 | length 36
  Top Layer w0.254: C3.1 C3.1@6.625,15.1 ; 15.037,6.3 15.2,6.3 ; v1(28.7,14.2) 28.718,14.218 30.553,14.218 U1.7@30.653,14.317
  Top Layer w0.4: C1.1 4.124,15.326 4.124,14.276 6.625,11.775 ; C3.1@6.625,15.1 6.625,11.775 ; U.3@13.6,14.9 13.6,7.737 15.037,6.3 12.1,6.3 6.625,11.775 ; 15.2,6.3 J8.2
  other v2: 55.6,19 45.654,19.054 50.654,19.054 46.4,19.7 51.4,19.7 56.4,19.7
VCC2: IC1.1 J6.1 J7.4 | length 33.5
  Top Layer w0.254: IC1.1 60.345,33.195 J7.4 J6.1@61.55,5.845
pads on no net: IC3.14 IC3.15 IC3.19 U1.8

## Polygon pours and split planes (outlines as drawn)
GND on Bottom Layer "GND_L04_P014" (solid, pour order 14): 0,40 0,0 68.05,0 68.05,40
VBAT1 on Bottom Layer "VBAT1_L04_P010" (solid, pour order 10): 37.5,13.313 36.5,12.313 36.5,0.3 18.1,0.3 18.1,4.2 26,4.2 30,8.2 30,13 32.8,15.8 37.5,15.8
VBAT1 on Bottom Layer "VBAT1_L04_P006" (solid, pour order 6): 57.25,11.8 44.5,11.8 44.25,12.05 44.25,12.8 44,13.05 42.25,13.05 41.75,13.55 39.75,13.55 39.25,13.05 34,13.05 33.75,13.3 33.75,15.8 57.25,15.8
VBAT2 on Bottom Layer "VBAT2_L04_P005" (solid, pour order 5): 57.25,20.05 44.5,20.05 44.25,19.8 44.25,19.3 44,19.05 42,19.05 41.5,18.55 39.5,18.55 39,19.05 32.1,19.05 32.1,16.3 57.25,16.3
VBAT2 on Bottom Layer "VBAT2_L04_P011" (solid, pour order 11): 32.4,16.1 29.6,13.3 29.6,8.4 25.7,4.5 18.1,4.5 18.1,8.2 22.2,8.2 27.3,13.3 27.3,16.8 29.55,19.05 32.4,19.05
NetR31_1 on Bottom Layer "NETR31_1_L04_P000" (solid, pour order 0): 44.75,11.3 57.25,11.3 57.25,5.05 44.75,5.05
NetR17_1 on Bottom Layer "NETR17_1_L04_P001" (solid, pour order 1): 44.75,26.8 57.25,26.8 57.25,20.55 44.75,20.55
NetQw_2 on Bottom Layer "NETQW_2_L04_P003" (solid, pour order 3): 57.25,4.55 44.75,4.55 44.5,4.8 44.5,9.8 42,9.8 41.75,10.05 41.75,12.55 41.25,13.05 40.25,13.05 39.75,12.55 39.75,9.8 36.75,9.8 36.75,0.3 57.25,0.3
balancer2- on Bottom Layer "BALANCER2-_L04_P008" (solid, pour order 8): 57.25,27.3 44.75,27.3 44.5,27.05 44.5,26.55 44.5,22.3 41.75,22.3 41.5,22.05 41.5,19.55 41,19.05 40,19.05 39.5,19.55 39.5,22.3 36.5,22.3 36.5,31.8 57.25,31.8
GND on Top Layer "GND_L01_P016" (solid, pour order 16): 0,40 0,0 68.05,0 68.05,40
3V3 on Top Layer "3V3_L01_P012" (solid, pour order 12): 12,16.15 12,13.9 10.7,13.9 10.6,14 10.6,16.1 9.6,17.1 9.6,22.25 15.65,22.25 15.8,22.1 21.6,22.1 22.4,21.3 22.4,16.8 21.5,15.9 19.8,15.9 19.6,16.1 18.7,17 12.85,17
VBAT1 on Top Layer "VBAT1_L01_P009" (solid, pour order 9): 42.3,19 43.3,19 47.9,15.126 47.9,14.037 44.2,14 41.895,16.305 41.895,18.595
NetQw_2 on Top Layer "NETQW_2_L01_P007" (solid, pour order 7): 57.25,4.55 44.75,4.55 44.5,4.8 44.5,9.8 42,9.8 41.75,10.05 41.75,12.55 41.25,13.05 40.25,13.05 39.75,12.55 39.75,9.8 36.75,9.8 36.75,0.3 57.25,0.3
balancer2- on Top Layer "BALANCER2-_L01_P004" (solid, pour order 4): 57.25,27.3 44.75,27.3 44.5,27.05 44.5,26.55 44.5,22.3 41.6,22.3 41.6,19.65 41,19.05 40,19.05 39.4,19.65 39.4,22.3 36.5,22.3 36.5,31.8 57.25,31.8
GND on Layer 2 "GND_L03_P013" (solid, pour order 13): 0,40 0,0 68.1,0 68.1,40
GND on Layer 1 "GND_L02_P015" (solid, pour order 15): 0,40 0,0 68.05,0 68.05,40

## Silkscreen, mask and mechanical layers (free items; w line width, h text height)
Top Overlay:
  region: 11450 vertices and 39 holes, not listed, extent 25.389,0.564 40.54,10.064
Mechanical 1:
  lines w0.1: 0,0 68.05,0 ; 0,0 0,40 68.05,40 68.05,0 ; 0,0 68.05,0

## Text inside footprints (layer, text, board x,y; h text height)
IC1: Top Overlay "*" at 57.902,32.814 h1.27 r180; Mechanical 13 "*" at 57.902,32.814 h1.27 r180